# Altium PCB 40-主控板-电路图.PcbDoc
Units mil, origin at the board's own origin, x right, y up, seen from the top; angles counter-clockwise.
Board outline 2637.8 x 3818.9 mil, 2 copper layers (Top Layer, Bottom Layer); 74 components, 83 nets, 419 pads, 185 vias.
Unrouted connection lines stored in the file: 3.
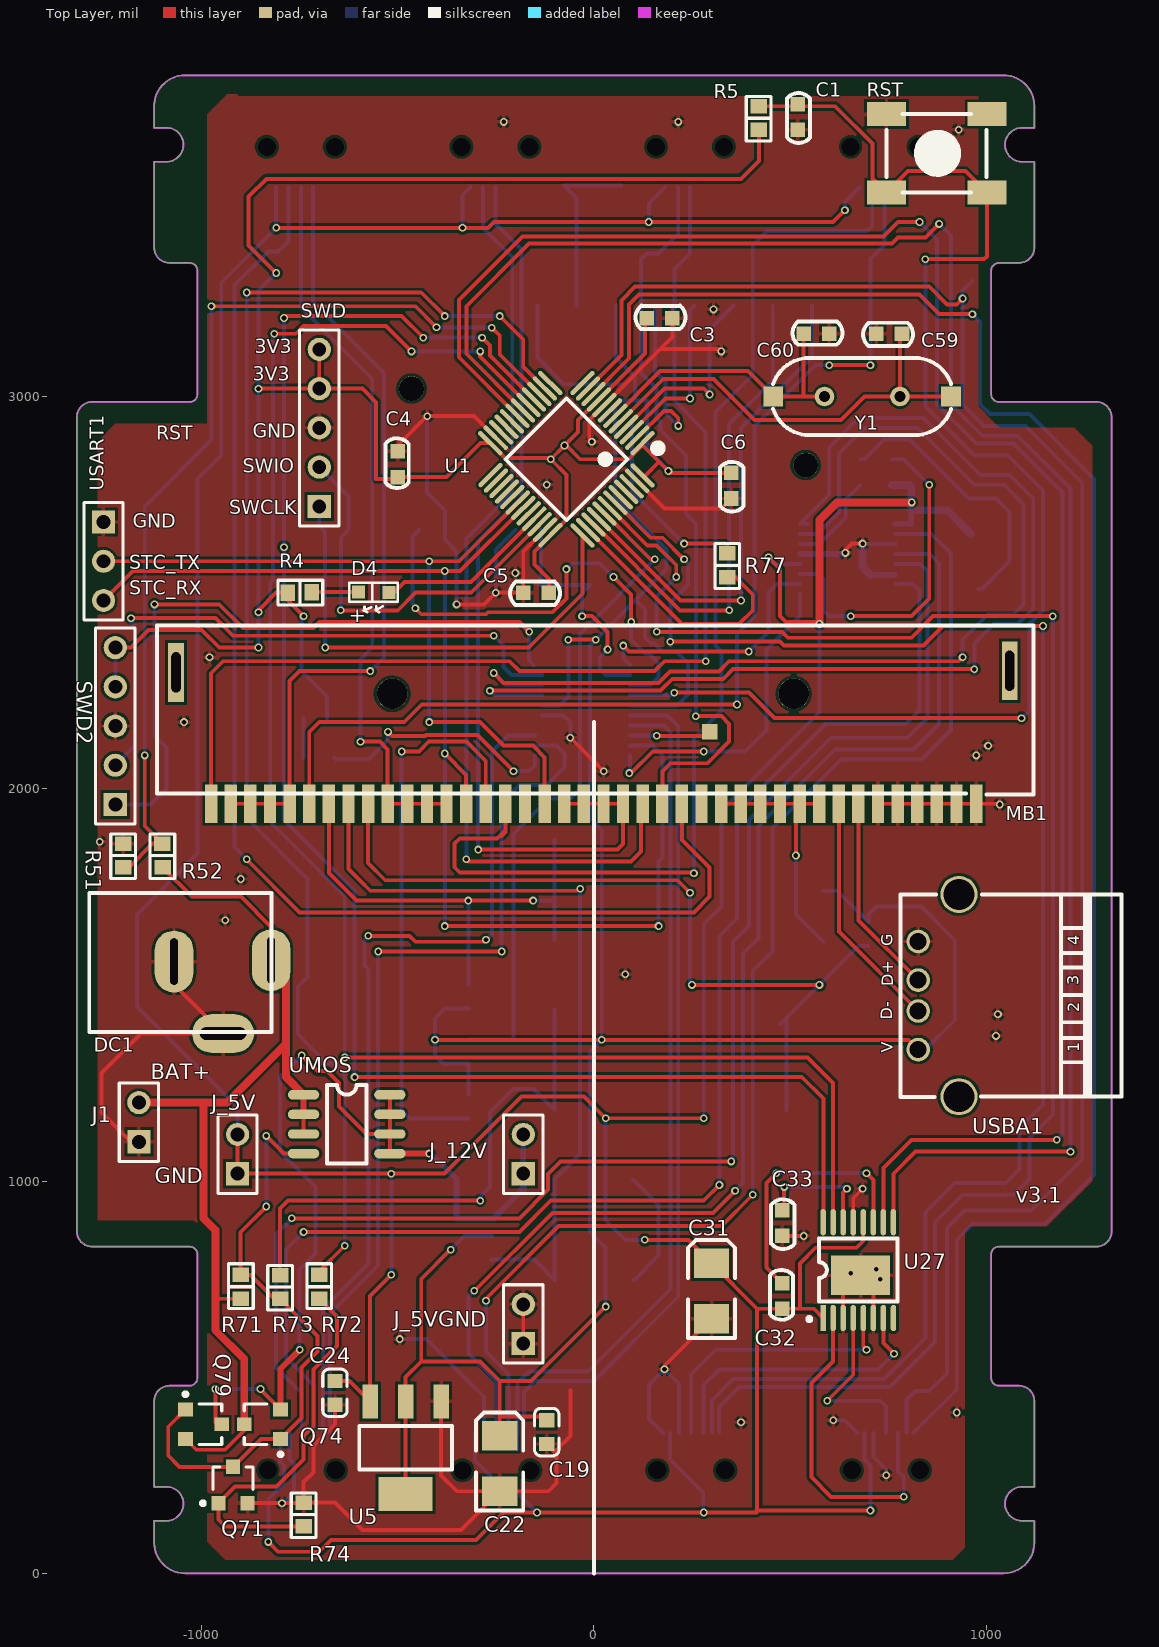
[diagram p0: Top Layer view]
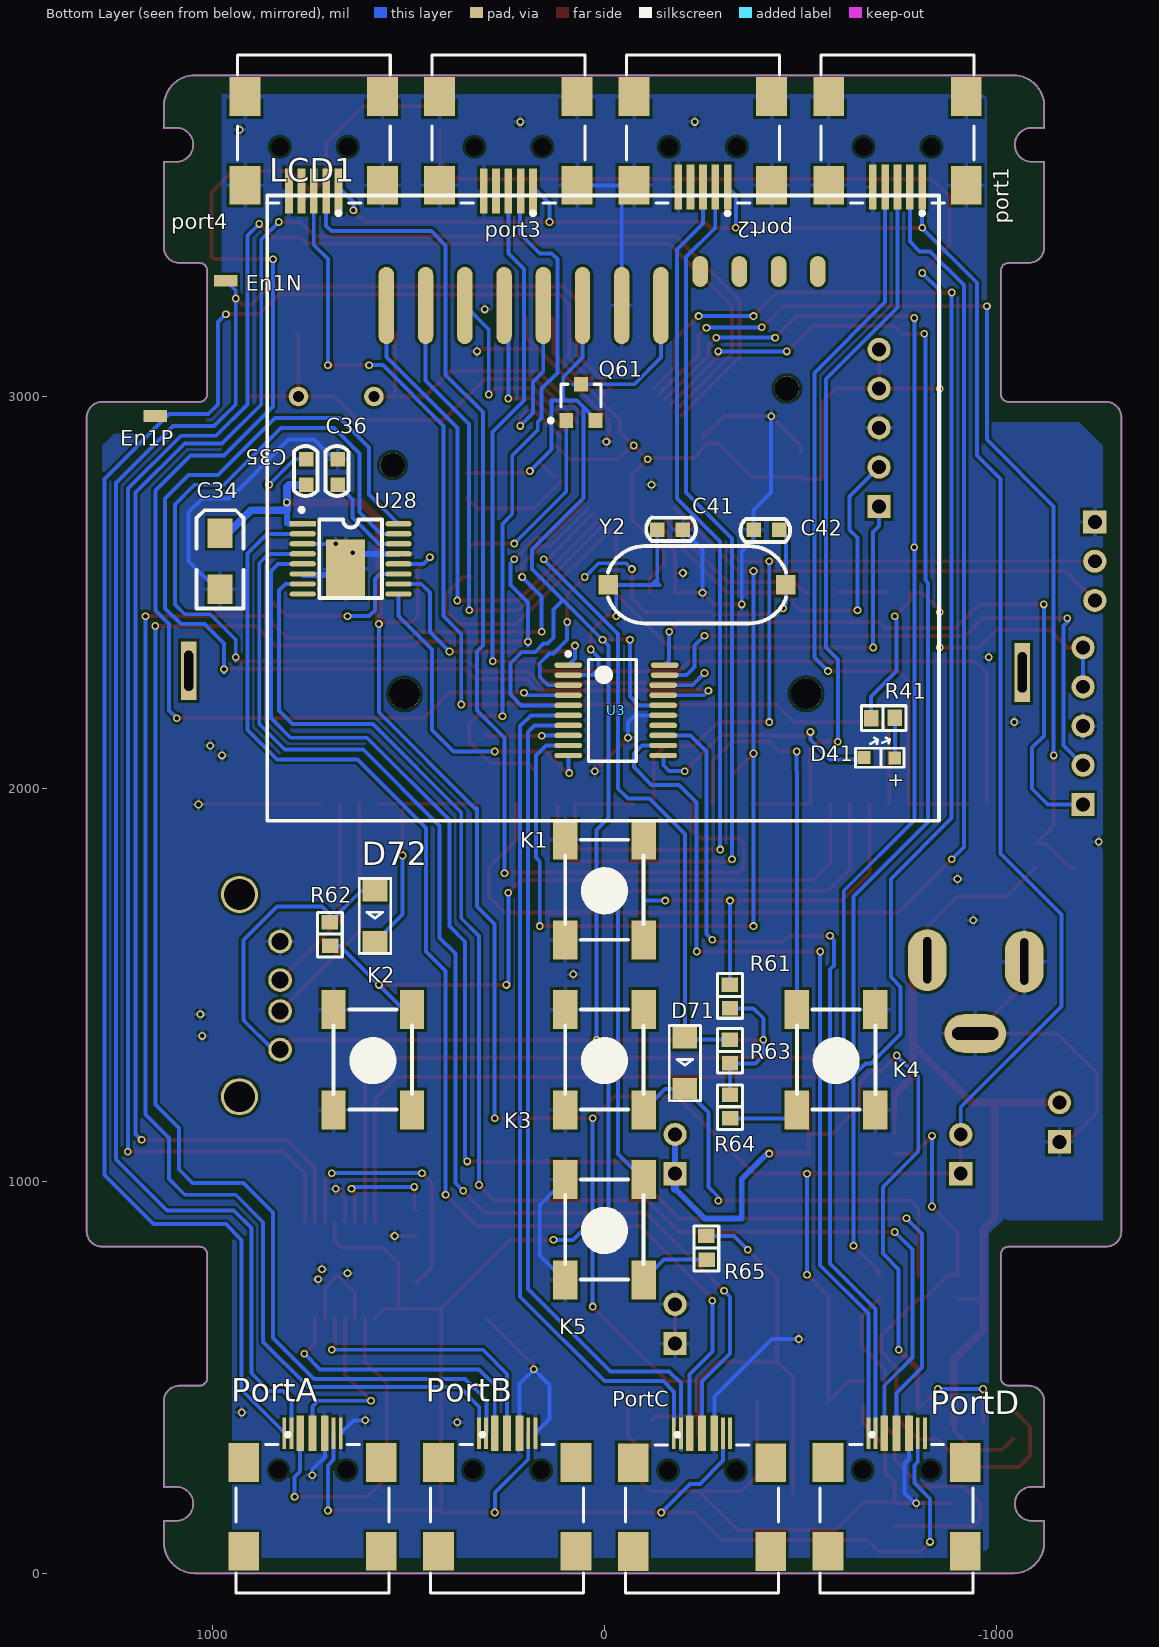
[diagram p1: Bottom Layer view, seen from below]

## Layer stack, top to bottom
Top Layer: signal copper 1.4
Dielectric: dielectric 12.6, FR-4, Dk 4.8
Bottom Layer: signal copper 1.4

## Board outline
-1121.01,220.47 -1089.52,220.47 cw(c-1089.52,177.17) -1089.52,133.86 -1121.01,133.86 -1121.01,78.74 ccw(c-1042.27,78.74) -1042.27,0 1044.34,0 ccw(c1044.34,78.74) 1123.08,78.74 1123.08,133.86 1091.59,133.86 cw(c1091.59,177.17) 1091.59,220.47 1123.08,220.47 1123.08,438.98 ccw(c1083.71,438.98) 1083.71,478.35 1032.53,478.35 cw(c1032.53,498.03) 1012.85,498.03 1012.85,812.99 cw(c1032.53,812.99) 1032.53,832.68 1280.56,832.68 ccw(c1280.56,872.05) 1319.93,872.05 1319.93,2946.85 ccw(c1280.56,2946.85) 1280.56,2986.22 1032.53,2986.22 cw(c1032.53,3005.91) 1012.85,3005.91 1012.85,3320.87 cw(c1032.53,3320.87) 1032.53,3340.55 1083.71,3340.55 ccw(c1083.71,3379.92) 1123.08,3379.92 1123.08,3598.43 1091.59,3598.43 cw(c1091.59,3641.73) 1091.59,3685.04 1123.08,3685.04 1123.08,3740.16 ccw(c1044.34,3740.16) 1044.34,3818.9 -1042.27,3818.9 ccw(c-1042.27,3740.16) -1121.01,3740.16 -1121.01,3685.04 -1089.52,3685.04 cw(c-1089.52,3641.73) -1089.52,3598.43 -1121.01,3598.43 -1121.01,3379.92 ccw(c-1081.64,3379.92) -1081.64,3340.55 -1030.46,3340.55 cw(c-1030.46,3320.87) -1010.78,3320.87 -1010.78,3005.91 cw(c-1030.46,3005.91) -1030.46,2986.22 -1278.49,2986.22 ccw(c-1278.49,2946.85) -1317.86,2946.85 -1317.86,872.05 ccw(c-1278.49,872.05) -1278.49,832.68 -1030.46,832.68 cw(c-1030.46,812.99) -1010.78,812.99 -1010.78,498.03 cw(c-1030.46,498.03) -1030.46,478.35 -1081.64,478.35 ccw(c-1081.64,438.98) -1121.01,438.98

## Design rules (kind name [scope] priority, off if disabled: settings)
Clearance [All] p1: gap=7
PolygonConnect [All] p1: connectstyle=Relief reliefconductorwidth=10 reliefentries=4 polygonreliefangle="90 Angle"
RoomDefinition ytBase30A [InComponentClass('ytBase30A')] p1: confinementstyle=ConfineIn formatcopy=TRUE lockcomponents=FALSE outline 1365,-38.09 2740,-38.09 2740,586.91 1365,586.91
RoutingVias [All] p1: holewidth=28 width=50 viastyle="Through Hole" minholewidth=28 minwidth=50 maxholewidth=28 maxwidth=50
SilkscreenOverComponentPads [All] p1: minsilkscreentomaskgap=10
SolderMaskExpansion [All] p1: expansion=4
TestPointUsage [All] p1: valid=0 allowmultiple=FALSE
Testpoint [All] p1: side=15 testpointundercomponent=TRUE minsize=40 maxsize=100 preferedsize=60 minholesize=0 maxholesize=40 preferedholesize=32 testpointgrid=1 style=1023 order=0123456789
Width [All] p1: maxlimit=10 minlimit=10 preferedwidth=10
23 further rules are at their usual default settings.

## Components (designator, comment, footprint, x,y, rotation, side; value= is the part's Value field where it differs from the comment)
C1 "104" C0603 520,3680 r0 top
C3 "0.1uf" C0603 200,3200 r90 top
C4 "0.1uf" C0603 -500,2860 r180 top
C5 "0.1uf" C0603 -180,2500 r270 top
C6 "0.1uf" C0603 350,2740 r0 top
C19 "0.1uf" LC-0603_C -120,360 r90 top
C22 "22uf" "CD B(3528)"#1 -240,280 r270 top
C24 "0.1uf" LC-0603_C -660,460 r90 top
C31 "10uf" "CD B(3528)"#1 300,720 r270 top
C32 "10nF" C0603 480,740 r180 top
C33 "2.2uF" C0603 480,860 r0 top
C34 "10uf" "CD B(3528)"#2 980,2580 r270 bottom
C35 "10nF" C0603 760,2840 r0 bottom
C36 "2.2uF" C0603 680,2840 r0 bottom
C41 "22P" C0603 -200,2660 r90 bottom
C42 "22P" C0603 -380,2660 r270 bottom
C59 "22P" C0603 720,3160 r270 top
C60 "22P" C0603 600,3160 r90 top
D4 "蓝色" D0603 -600,2500 r0 top
D41 "蓝色" D0603 -740,2080 r0 bottom
D71 "1N4148" SMD-IN4148#1 -180,1420 r270 bottom
D72 "1N4148" SMD-IN4148#2 650,1720 r180 bottom
DC1 "电源插口" DC1 -822.83,1562.99 r270 top locked
J1 "Header 2" HDR1X2 -1160,1100 r90 top
J_5V "Header 2" HDR1X2 -908.35,1018.74 r90 top
J_5VGND "Header 2" HDR1X2 -180,585.67 r90 top
J_12V "Header 2" HDR1X2 -180,1018.74 r90 top
K1 "3x6x5" KEY_4SMD -100,1870.08 r270 bottom locked
K2 "3x6x5" KEY_4SMD 490.55,1437.01 r270 bottom locked
K3 "3x6x5" KEY_4SMD -100,1437.01 r270 bottom locked
K4 "3x6x5" KEY_4SMD -690.55,1437.01 r270 bottom locked
K5 "3x6x5" KEY_4SMD -100,1003.94 r270 bottom locked
LCD1 "LCDJLX" LCDLJX-SHU 600,3240 r180 bottom locked
MB1 "MicroBit" IDE1 974.41,1961.81 r90 top locked
port1 "MicroUSB" USB/SM0.8-6H5#1 -742.01,3673.23 r90 bottom locked
port2 "MicroUSB" USB/SM0.8-6H5#1 -245.94,3673.23 r90 bottom locked
port3 "MicroUSB" USB/SM0.8-6H5#2 250,3673.23 r90 bottom locked (schematic designator MINI3)
port4 "MicroUSB" USB/SM0.8-6H5#2 746.06,3673.23 r90 bottom locked
PortA "MicroUSB" USB6P 806.3,287.4 r270 bottom locked
PortB "MicroUSB" USB6P 310.24,287.4 r270 bottom locked
PortC "MicroUSB" USB6P -186.61,287.09 r270 bottom locked
PortD "MicroUSB" USB6P -682.68,287.4 r270 bottom locked
Q61 "9015" sot-23r 60,2980 r180 bottom
Q71 "9014" sot-23r -920,220 r0 top
Q74 "9015" sot-23r -840,380 r90 top
Q79 "9015" sot-23r -1000,380 r270 top (schematic designator Q74)
R4 "1K" R0603 -780,2500 r0 top
R5 "1K" R0603 420,3740 r270 top
R41 "1K" R0603 -680,2180 r180 bottom
R51 "1k 0.1%" R0603 -1200,1860 r270 top
R52 "10k 0.1%" R0603 -1100,1860 r270 top
R61 "1K" R0603 -320,1440 r90 bottom
R62 "1K" R0603 700,1660 r270 bottom
R63 "1K" R0603 -320,1300 r90 bottom
R64 "1K" R0603 -320,1220 r270 bottom
R65 "1K" R0603 -260,860 r270 bottom
R71 "100K" R0603 -900,700 r90 top
R72 "10k" R0603 -700,700 r90 top
R73 "1.5k" R0603 -800,760 r270 top
R74 "4.7k" R0603 -740,180 r270 top
R77 "4.7k" R0603 340,2600 r270 top
RST "3x6x5" key_4smd 746.06,3720 r0 top
SWD "SWD" HDR1X5 -700,2720 r90 top
SWD2 "SWD2" HDR1X5 -1220,1960 r90 top
U1 "STM32F103C8T6" "LQFP48 7X7_M" -70,2840 r135 top
U3 "STM32F042F6P6" STM-TSSOP20_N -20,2200 r180 bottom (schematic designator U1)
U5 "AMS1117_1" LC-SOT-223 -480,320 r90 top
U27 "DRV8833" TSSOP16_M 660,580 r90 top
U28 "DRV8833" TSSOP16_M 840,2600 r180 bottom
UMOS "Comment" so-8 -740,1220 r0 top
USART1 "Header 3" HDR1X3 -1250,2680 r270 top
USBA1 "USB" USB-A 826.77,1614.17 r90 top locked
Y1 "8M" XTAL_US#1 780,3000 r180 top
Y2 "8M" XTAL_US#2 -140,2520 r180 bottom

## Footprints (in the part's own frame and the unit in brackets; to place one, negate y for a bottom-side part, rotate by r counter-clockwise, add the part's x,y. Pads: shape width x height; smd on the part's side, far side on the other; paste and mask are expansions set on the pad)
C0603 [mil]
  rect 37x37 smd: 1(0,0) 2(0,65.5)
  silkscreen extent -28,-34 32,94
"CD B(3528)"#1 [mil] "长3.5mm，宽2.8mm，厚1.9mm"
  rect 75x90 smd: 1(-70.87,-0.01) 2(70.86,-0.01)
  silkscreen extent -130,-60 120,60, body extent -69,-55 69,55, height 75
"CD B(3528)"#2 [mil] "长3.5mm，宽2.8mm，厚1.9mm"
  rect 75x62.99 smd: 1(-70.87,-0.01) 2(70.86,-0.01)
  silkscreen extent -130,-60 120,60, body extent -69,-55 69,55, height 75
D0603 [mil]
  rect 33x33 smd: 1(0,1.5) 2(78,0)
  silkscreen extent -24,-50 100,25
DC1 [mm]
  oval 4x2.5 hole 0.5 slot 3 at 0 deg: 1(0,0) 3(0.089,-6.286)
  oval 2.5x4 hole 0.8 slot 3 at 90 deg: 2(4.75,-3.111)
  silkscreen extent -4.36,-11.77 4.66,0.04
HDR1X2 [mm] "Connector; Header; 2 Position"
  rect 1.5x1.5 hole 0.9: 1(0,0)
  round 1.5 hole 0.9: 2(2.54,0)
  silkscreen extent -1.27,-1.27 3.81,1.27
HDR1X3 [mm] "Connector; Header; 3 Position"
  rect 1.5x1.5 hole 0.9: 1(0,0)
  round 1.5 hole 0.9: 2(2.54,0) 3(5.08,0)
  silkscreen extent -1.27,-1.27 6.35,1.27
HDR1X5 [mm] "Connector; Header; 5 Position"
  rect 1.5x1.5 hole 0.9: 1(0,0)
  round 1.5 hole 0.9: 2(2.54,0) 3(5.08,0) 4(7.62,0) 5(10.16,0)
  silkscreen extent -1.27,-1.27 11.43,1.27
IDE1 [mm]
  rect 2.5x0.8 smd: 1(0,49.53) 2(0,48.26) 3(0,46.99) 4(0,45.72) 5(0,44.45) 6(0,43.18) 7(0,41.91) 8(0,40.64) 9(0,39.37) 10(0,38.1) 11(0,36.83) 12(0,35.56) 13(0,34.29) 14(0,33.02) 15(0,31.75) 16(0,30.48) 17(0,29.21) 18(0,27.94) 19(0,26.67) 20(0,25.4) 21(0,24.13) 22(0,22.86) 23(0,21.59) 24(0,20.32) 25(0,19.05) 26(0,17.78) 27(0,16.51) 28(0,15.24) 29(0,13.97) 30(0,12.7) 31(0,11.43) 32(0,10.16) 33(0,8.89) 34(0,7.62) 35(0,6.35) 36(0,5.08) 37(0,3.81) 38(0,2.54) 39(0,1.27) 40(0,0)
  rect 3.81x1.016 hole 0.6 slot 2.6 at 0 deg: 41(8.611,-2.172) 42(8.509,51.803)
  round 2 hole 2: 43(7.12,37.808) 44(7.12,11.811)
  silkscreen extent 0.6,-3.71 11.53,53.04
KEY_4SMD [mil]
  rect 100x62 smd: 1(0,0) 1(255.91,0) 2(0,-200) 2(255.91,-200)
  silkscreen extent 0,-200 255,0
key_4smd [mil]
  rect 100x62 smd: 1(0,0) 1(255.91,0) 2(0,-200) 2(255.91,-200)
  silkscreen extent 0,-200 255,0
LC-0603_C [mm]
  rect 0.93x0.98 smd: 1(-0.77,0) 2(0.77,0)
  silkscreen extent -1.54,-0.79 1.54,0.79, body extent -0.8,-0.4 0.8,0.4, height 0.3
LC-SOT-223 [mm]
  rect 2.2x1 smd: 1(3,-2.3) 2(3,0) 3(3,2.3)
  rect 2.2x3.5 smd: 2(-3,0)
  silkscreen extent -1.4,-3 1.4,3, body extent -3.49,-3.24 3.49,3.24, height 1.64
LCDLJX-SHU [mm]
  oval 1x2 smd: 1(29.058,2) 2(26.518,2) 3(23.978,2) 4(21.438,2)
  oval 1x5 smd: 5(18.898,-0.2) 6(16.358,-0.2) 7(13.818,-0.2) 8(11.278,-0.2) 9(8.738,-0.2) 10(6.198,-0.2) 11(3.658,-0.2) 12(1.118,-0.2)
  silkscreen extent -6.59,-33.57 36.91,6.93
"LQFP48 7X7_M" [mm] "48脚，体宽7x7mm，脚距0.5mm"
  oval 0.3x2.1 smd: 1(-2.75,-4.227) 2(-2.25,-4.227) 3(-1.75,-4.227) 4(-1.25,-4.227) 5(-0.75,-4.227) 6(-0.25,-4.227) 7(0.25,-4.227) 8(0.75,-4.227) 9(1.25,-4.227) 10(1.75,-4.227) 11(2.25,-4.227) 12(2.75,-4.227) 25(2.75,4.202) 26(2.25,4.202) 27(1.75,4.202) 28(1.25,4.202) 29(0.75,4.202) 30(0.25,4.202) 31(-0.25,4.202) 32(-0.75,4.202) 33(-1.25,4.202) 34(-1.75,4.202) 35(-2.25,4.202) 36(-2.75,4.202)
  oval 2.1x0.3 smd: 13(4.227,-2.75) 14(4.227,-2.25) 15(4.227,-1.75) 16(4.227,-1.25) 17(4.227,-0.75) 18(4.227,-0.25) 19(4.227,0.25) 20(4.227,0.75) 21(4.227,1.25) 22(4.227,1.75) 23(4.227,2.25) 24(4.227,2.75) 37(-4.227,2.75) 38(-4.227,2.25) 39(-4.227,1.75) 40(-4.227,1.25) 41(-4.227,0.75) 42(-4.227,0.25) 43(-4.227,-0.25) 44(-4.227,-0.75) 45(-4.227,-1.25) 46(-4.227,-1.75) 47(-4.227,-2.25) 48(-4.227,-2.75)
  silkscreen extent -3.93,-4.95 2.79,2.79, body extent -4.5,-4.5 4.5,4.5, height 1.45
R0603 [mil]
  rect 37x42 smd: 1(0,0) 2(60.5,0.5)
  silkscreen extent -25,-32 89,31
SMD-IN4148#1 [mm]
  rect 1.4x1.6 smd: 1(1.397,0.635) 2(4.699,0.635)
  silkscreen extent 0.6,-0.38 5.46,1.65
SMD-IN4148#2 [mm]
  rect 1.6x1.4 smd: 1(1.651,0.508) 2(1.651,-2.794)
  silkscreen extent 0.63,-3.56 2.67,1.31
so-8 [mil]
  oval 80x24 smd: 1(0,0) 2(0,-50) 3(0,-100) 4(0,-150) 5(220,-150) 6(220,-100) 7(220,-50) 8(220,0)
  silkscreen extent 60,-175 160,25
sot-23r [mm]
  rect 0.9x0.95 smd: 1(-0.95,-1.048) 2(0.95,-1.048) 3(0,1.302)
  silkscreen extent -2.07,-1.17 1.3,1.3
STM-TSSOP20_N [mm] "SOP, 20-Leads, Body 6.6x4.5mm, Pitch 0.65mm, IPC Medium Density"
  oval 1.8x0.35 smd: 1(-2.85,2.925) 2(-2.85,2.275) 3(-2.85,1.625) 4(-2.85,0.975) 5(-2.85,0.325) 6(-2.85,-0.325) 7(-2.85,-0.975) 8(-2.85,-1.625) 9(-2.85,-2.275) 10(-2.85,-2.925) 11(3.292,-2.925) 12(3.292,-2.275) 13(3.292,-1.625) 14(3.292,-0.975) 15(3.292,-0.325) 16(3.292,0.325) 17(3.292,0.975) 18(3.292,1.625) 19(3.392,2.275) 20(3.392,2.925)
  silkscreen extent -2.98,-3.3 1.55,3.77, body extent -2.25,-3.3 2.25,3.3, height 1.2
TSSOP16_M [mm]
  rect 1.7x0.35 smd: 1(1.802,1.919)
  oval 1.7x0.35 smd: 2(1.802,1.269) 3(1.802,0.619) 4(1.802,-0.031) 5(1.802,-0.681) 6(1.802,-1.331) 7(1.802,-1.981) 8(1.802,-2.631) 9(8.002,-2.631) 10(8.002,-1.981) 11(8.002,-1.331) 12(8.002,-0.681) 13(8.002,-0.031) 14(8.002,0.619) 15(8.002,1.269) 16(8.002,1.919)
  silkscreen extent 1.6,-2.9 6.93,2.95, body extent 1.7,-2.86 8.1,2.14, height 1.03
USB6P [mm]
  rect 2.032x0.254 smd: 1(-1.778,-0.254) 2(-1.778,0.203) 5(-1.778,3.402) 6(-1.778,2.946)
  rect 2.3x0.5 smd: 3(-1.778,0.775) 4(-1.778,1.575) 5(-1.778,2.375)
  rect 2.5x2 smd: 7(0.122,-2.875) 7(0.122,6.025) 7(5.876,-2.875) 7(5.876,6.025)
  round 0.9 hole 1.17 unplated: MH1(0.622,3.774) MH2(0.622,-0.625)
  silkscreen extent -1.8,-3.38 8.57,6.52
USB-A [mm]
  round 1.524 hole 1.1: 1(-7.089,-0.002) 2(-4.589,-0.002) 3(-2.589,-0.002) 4(-0.089,-0.002)
  round 2.4 hole 2: 5(-10.139,-2.637) 5(2.961,-2.637)
  silkscreen extent -10.17,-13.16 2.96,1.14, body extent -11.29,-12.98 4.51,1.18, height 2.2
USB/SM0.8-6H5#1 [mm]
  rect 2.9x0.5 smd: 1(-3.532,-1.727) 2(-3.532,-0.927) 3(-3.532,-0.127) 4(-3.532,0.673) 5(-3.532,1.473)
  rect 2.5x2 smd: 6(-3.432,-4.577) 6(-3.432,4.323) 7(2.322,-4.577) 7(2.322,4.323)
  round 0.6 hole 1.17 unplated: MH1(-0.932,2.073) MH2(-0.932,-2.327)
  silkscreen extent -5.36,-5.08 5.02,4.82
USB/SM0.8-6H5#2 [mm]
  rect 2.9x0.5 smd: 1(-3.8,-1.727) 2(-3.8,-0.927) 3(-3.8,-0.127) 4(-3.8,0.673) 5(-3.8,1.473)
  rect 2.5x2 smd: 6(-3.432,-4.577) 6(-3.432,4.323) 7(2.322,-4.577) 7(2.322,4.323)
  round 0.6 hole 1.17 unplated: MH1(-0.932,2.073) MH2(-0.932,-2.327)
  silkscreen extent -5.36,-5.08 5.02,4.82
XTAL_US#1 [mil]
  rect 50x50 smd: 1(-130.32,0) 2(322.44,0)
  round 50 hole 28: 1(0,0) 2(192.12,0)
  silkscreen extent -131,-98 323,98
XTAL_US#2 [mil]
  round 0 all layers, no hole: 1(0,0) 2(192.13,0)
  rect 50x50 smd: ""(-130.32,0) ""(322.44,0)
  silkscreen extent -131,-98 323,98

## Part data
C1 C32 C33 C35 C36 C41 C42 C59 C60: library part C, "无极性贴片电容"
C3 C4 C5 C6: library part Cap, "Capacitor"
C19 C24: library part cap
C22 C31 C34: library part "Cap Pol2", "Polarized Capacitor (Axial)"
D4 D41: library part LED-SMD, "贴片LED"
D71 D72: library part "Diode 1N4148", "High Conductance Fast Diode"
DC1: library part power_port
J1 J_5V J_5VGND J_12V: "Header, 2-Pin"
port1 port2 port3 port4 PortA PortB PortD: library part 440478-2, "USB 2.0, Right Angle, SMT, A Type, Receptacle, 5 Position, Black"
Q61 Q74 Q79: library part PNP9015
Q71: library part NPN, "NPN Bipolar Transistor"
R4 R5 R41 R61 R62 R63 R64 R65 R71: library part R, "贴片电阻"
R51 R52 R72 R73 R74 R77: library part R
RST: library part "TSW 3x6", "3x6轻触开关"
SWD SWD2: library part "Header 5", "5P接插件"
U1: "STM32 ARM-based 32-bit MCU with 64 Kbytes Flash, 48-pin LQFP, Industrial Temperature"
U3: library part STM32F030F4P6, "ARM Cortex-M0 32-bit MCU, 16 KB Flash, 4 KB Internal RAM, 15 I/Os, 20-pin TSSOP, -40 to 85 degC, Tube"
U5: "3.3V电压转换器AMS1117"
U27 U28: library part DRV8833_NEW, "双H-桥电机驱动"
USART1: "Header, 3-Pin"
Y1 Y2: library part XTAL, "Crystal Oscillator"

## Free pads (board coordinates)
  round 62.99 hole 62.99: 0(-465,3020) 0(540,2825)
  rect 39.37x39.37 smd: 0(295,2145)
  rect 100x150 smd far side: 0(660,2560)
  rect 150x100 smd: 0(680,760)
  rect 60x30 smd far side: 0(965,3295) 0(1145,2950)

## Via types
v1: diameter 19.68, hole 11.81, Top Layer to Bottom Layer, 185 vias

## Nets (pads, with @x,y where several pads share a name; then routed paths per layer and width w, separated by ;. In a path a pad name is that pad's centre, name@x,y a point inside that pad or via, vN(x,y) a via of type N, cw(c..) or ccw(c..) an arc to the next point about the centre after c; other vN are vias at no path point)
3V3: C3.2 C4.2 C5.2 C6.2 C19.2 C22.1 D72.1 LCD1.7 Q61.2 R4.1 R5.2 R41.1 R61.1 R62.1 R63.1 R64.1 R65.1 SWD2.4 SWD2.5 SWD.4 SWD.5 U1.1 U1.9 U1.24 U1.36 U1.48 U3.5 U3.16 U5.2 USBA1.1 | length 13986.6
  Top Layer w10: SWD2.5 -1180,2360 -1135,2405 -1000,2405 -955,2360 v1(-855,2360) ; v1(-855,2450) -855,2455 -810,2500 R4.1 -780,2480 v1(-740,2440) ; v1(-855,3020) -795,3020 SWD.4 ; v1(-810,3315) -880,3385 -880,3510 -835,3555 375,3555 420.5,3600.5 R5.2 ; SWD.5 SWD.4 ; U5.2@-480,201.89 -480,438.11 -480,500 -440,540 ; v1(-405,1360) v1(20,1360) 801.77,1360 826.69,1335.08 USBA1.1 USBA1.1@826.77,1335 ; v1(-365,825) -440,750 -440,540 ; C22.1 -240.01,400 ; C19.2 -129.69,400 -240.01,400 ; C5.2 -114.5,2534.5 -151.89,2571.89 -151.89,2605 U1.36 -70,2686.89 -70,2800 v1(-110,2840) ; v1(-65,2380) v1(5,2380) v1@8.4,2383.4 ; v1(30,680) -159.99,490.01 -240.01,490.01 ; 40,2840 55,2840 ; U1.48 131.47,2798.88 166.29,2833.71 ; C3.2 130,3195.5 130,3109.6 U1.9 -40,2939.6 -40,2910 v1(-75,2875) ; C6.2@350,2805 195,2805 v1(190,2810) 166.29,2833.71 ; SWD.4 -590,3020 -555,2985 -555,2790 -504.5,2790 C4.2 -375.5,2794.5 -288.88,2881.12 U1.24 -226.56,2843.44 -113.44,2843.44 v1(-110,2840) ; -440,540 -290,540 -240.01,490.01 ; -240.01,400 -240.01,490.01 ; v1(-110,2840) v1(-75,2875) ; v1(-75,2875) -70,2875 -35,2840 55,2840 ; 55,2840 88.46,2840 124.23,2875.77 166.29,2833.71
  Bottom Layer w10: SWD2.4 SWD2.5 ; v1(-855,2360) v1(-855,2450) v1(-855,3020) -855,3270 v1(-810,3315) ; -745,2390 -745,2355 ; v1(-740,2440) -745,2435 -745,2355 ; R41.1 -680,2235 -745,2300 -745,2355 ; v1(-365,825) -330,860 R65.1 ; R64.1 R63.1 -385,1300 -405,1320 v1(-405,1360) -405,1415 -380,1440 R61.1 ; U3.16@-132.2,2212.8 -87.2,2212.8 -65,2235 v1(-65,2380) ; Q61.2 22.6,2942.6 53.43,2973.43 ; v1(30,680) 30,830 -10,870 -10,1330 v1(20,1360) 20,1895 -10,1925 -10,2365 v1(5,2380) 105.87,2480.87 ; LCD1.7 56,3099 105,3050 105,2990 ; U3.5 212.8,2212.8 240,2240 240,2320 212,2348 177,2348 155,2370 145,2370 130,2385 130,2456.74 105.87,2480.87 ; v1(190,2810) 135,2865 135,2990 105,2990 ; D72.1 620,1740 R62.1 700,1680 720,1700 835,1700 920,1615 920,1410 845.08,1335.08 USBA1.1 ; 53.43,2973.43 70,2990 105,2990 ; 53.43,2973.43 53.43,2741.57 185,2610 185,2560 105.87,2480.87
5V: C24.2 C31.1 C32.2 C34.1 C35.2 J_5V.1 J_5V.2 port1.1 port2.1 port3.1 port4.1 PortA.6 PortB.6 PortC.6 PortD.6 U5.3 U27.1 U27.12 U28.1 U28.12 | length 13613.5
  Top Layer w10: J_5V.2 J_5V.1 v1(-516.26,1018.74) ; v1(-830,80) -805,55 -700,55 -670,85 -300,85 -230,155 v1(-145,155) v1(280,155) 415,155 ; v1(-810,3430) v1(-335,3430) -270,3430 -255,3445 v1(140,3445) 610,3445 v1(640,3475) ; C24.2 -622.76,490.31 U5.3 ; U5.3@-582.76,450.31 U5.3 ; v1(-516.26,761.26) -570.55,706.97 U5.3 ; v1@-515,1020 v1(-516.26,1018.74) ; v1(130,850) 240.87,850 C31.1 416.37,674.5 ; v1(280,1160) v1(30,1160) -25,1215 -185,1215 -381.26,1018.74 v1(-516.26,1018.74) ; v1(445,2590) 475,2560 475,2440 490,2425 570,2425 v1(575,2420) ; U27.1 560.89,674.5 525,674.5 ; U27.12 686.8,846.8 670,830 565,830 525,790 525,674.5 ; v1(705,160) 415,160 416.37,161.37 416.37,674.5 ; 416.37,674.5 C32.2 525,674.5
  Top Layer w20: v1(575,2420) 575,2685 620,2730 v1(810,2730)
  Bottom Layer w10: -1165,1610 -1165,1570 ; J_5V.2 -908.35,1188.35 -1165,1445 -1165,1570 ; v1(-830,80) -830,190 -790,230 -790,275 -798.66,283.66 PortD.6 ; port1.1 v1(-810,3430) -950,3290 -950,2850 -1010,2790 -1010,1835 -1165,1680 -1165,1570 ; v1(-516.26,1018.74) v1(-516.26,761.26) v1@-515,760 ; v1(-335,3430) -335,3513.11 port2.1 ; PortC.6 -302.6,287.6 -243.11,228.11 -218.11,228.11 v1(-145,155) ; v1(30,1160) 30,900 80,850 v1(130,850) ; v1(140,3445) 140,3492.17 port3.1@182.01,3534.17 ; PortB.6 194.25,290.75 278.74,206.26 278.74,156.26 v1(280,155) ; v1(280,1160) 280,1655 325,1700 325,1950 330,1950 575,2195 v1(575,2420) ; v1(445,2590) 461.8,2573.2 U28.12 U28.12@526.75,2575 ; v1(640,3475) 640,3496.1 port4.1@678.07,3534.17 ; PortA.6 690.31,289.69 705,275 v1(705,160) ; 804.55,2774.5 809.05,2770
  Bottom Layer w15: U28.1 809.05,2675.57 809.05,2710
  Bottom Layer w20: C35.2 804.55,2774.5 ; 809.05,2770 809.05,2710 900.88,2710 C34.1@960.01,2650.87
12V: DC1.1 J1.2 Q74.3 Q79.2 R52.2 R71.1 UMOS.1 UMOS.2 UMOS.3 | length 2514.6
  Top Layer w10: R52.2 -1025,1725 -900,1725 -822.83,1647.83 DC1.1 DC1.1@-785,1525.16 ; Q79.2 -1013.66,315 -940,315 -891.26,363.74 Q74.3 ; -965,685 -965,700 R71.1 ; UMOS.3 UMOS.2
  Top Layer w15: UMOS.2 UMOS.1
  Top Layer w20: J1.2@-1180,1200 J1.2 -1045,1200 ; -1060,1200 -1045,1200 ; Q74.3 -891.26,546.26 -965,620 -965,700 -965,875 -995,905 -995,1200 ; DC1.1@-785,1525.16 -785,1350 ; UMOS.1 -785,1265 -785,1350 ; -1045,1200 -995,1200 ; -995,1200 -935,1200 -785,1350
ADC1: R51.2 R52.1 U1.15 | length 2595.1
  Top Layer w10: R51.2 -1185.5,1799.5 -1125,1860 R52.1 -1145,1905 -1145,2050 ; -1145,2025 -1145,2050 ; v1(-1145,2085) -1145,2050 ; v1(-975,3230) -455,3230 v1(-401.23,3176.23) ; v1(-260,3175) -240,3155 -240,3107.44 U1.15
  Bottom Layer w10: v1@-1145,2080 v1(-1145,2085) -1145,2720 -975,2890 -975,3135 ; -975,3160 -975,3135 ; v1(-975,3230) -975,3135 ; v1(-401.23,3176.23) -261.23,3176.23 v1(-260,3175)
AIN1: U1.16 U27.16 | length 4308.2
  Top Layer w10: v1(-790,3200) -785,3205 -490,3205 v1(-435,3150) ; v1(-610,1265) 530,1265 585,1210 585,895.61 U27.16 ; v1@-432.5,3152.5 v1@-430,3150 ; v1(-285,3150) -265,3130 -265,3104.6 U1.16
  Bottom Layer w10: -790,3190 -790,3170 ; v1(-790,3200) -790,3170 ; v1(-610,1265) -610,1740 -790,1920 v1(-790,2615.88) -790,3170 ; v1(-435,3150) v1(-285,3150)
AIN2: U1.17 U27.15 | length 4312.4
  Top Layer w10: v1(-815,3160) -760,3160 -740,3180 -530,3180 v1(-465,3115) v1@-465,3120 ; v1(-635,1315) -525,1315 545,1315 610.02,1249.98 U27.15 ; v1(-290,3115) -290,3101.76 U1.17
  Bottom Layer w10: v1@-815,3165 -818.16,3161.84 -818.16,2531.84 -825,2525 -825,1915 -635,1725 v1(-635,1315) ; v1(-465,3115) v1(-290,3115)
AO1: PortA.3 U27.2 | length 938.7
  Top Layer w10: 610.02,610.95 610.02,580 ; U27.2 610.02,580 ; 690,195 640,195 ; v1@795,195 v1(790,195) 640,195 ; 610.02,580 610.02,540.02 555,485 555,245 605,195 640,195
  Bottom Layer w10: PortA.3 775.81,259.19 790,245 v1(790,195)
AO2: PortA.4 U27.4 | length 461.9
  Top Layer w10: v1(595,440) 661.2,506.2 U27.4
  Bottom Layer w10: v1(595,440) 730,440 744.31,425.69 PortA.4
BIN1: U1.18 U27.9 | length 4771.9
  Top Layer w10: U1.18 -325,3108.92 -325,3230 -165,3390 760,3390 775,3405 845,3405 v1(880,3440) ; U27.9 763.57,1018.57 820,1075 v1(1215,1075)
  Bottom Layer w10: v1(880,3440) 910,3410 910,3280 910,2980 990,2900 1080,2900 1215,2765 v1(1215,1075)
BIN2: U1.19 U27.10 | length 4776.4
  Top Layer w10: U1.19 -343.92,3100 -343.92,3246.08 -181.84,3408.16 738.16,3408.16 775,3445 v1(830,3445) ; U27.10 737.98,1032.98 810,1105 v1(1180,1105)
  Bottom Layer w10: v1(830,3445) 875,3400 875,2980 975,2880 1070,2880 1195,2755 1195,1120 v1(1180,1105)
BO1: PortB.3 U27.7 | length 743
  Top Layer w10: U27.7 737.98,587.02 v1(765,560)
  Bottom Layer w10: PortB.3 279.74,479.74 320,520 725,520 v1(765,560)
BO2: PortB.4 U27.5 | length 707.5
  Top Layer w10: U27.5 686.8,578.2 v1(695,570)
  Bottom Layer w10: PortB.4 248.25,508.25 310,570 v1(695,570)
BOOT0: U1.44
CIN1: U3.17 U28.16 | length 2819.8
  Top Layer w10: v1(-265,2250) 170,2250 199.73,2279.73 329.73,2279.73 355,2305 v1(970,2305)
  Bottom Layer w10: v1(-265,2250) -253.39,2238.39 U3.17@-132.2,2238.39 ; U28.16@545.57,2675.57 U28.16 600,2750.61 600,2870 675,2945 840,2945 985,2800 1060,2800 1120,2740 1120,2460 1080,2420 1020,2420 970,2370 v1(970,2305) 970,2295
CIN2: U3.18 U28.15 | length 2720.8
  Top Layer w10: v1(-255,2295) -230,2270 165,2270 194.14,2299.14 319.14,2299.14 345,2325 930,2325 v1(940,2335)
  Bottom Layer w10: v1(-255,2295) -223.98,2263.98 U3.18@-132.2,2263.98 ; U28.15 569.98,2649.98 625,2705 625,2855 690,2920 825,2920 970,2775 1045,2775 1095,2725 1095,2470 1070,2445 1005,2445 940,2380 v1(940,2335) 940,2325
CO1: PortC.3 U28.2 | length 3282.6
  Top Layer w10: v1(-275,695) -275,700 -90,885 325,885 v1(405,965)
  Bottom Layer w10: v1(-275,695) -275,565 -217.11,507.11 PortC.3 ; v1(405,965) 405,1535 455,1585 455,1900 630,2075 835,2075 910,2150 910,2600 860.02,2649.98 834.98,2649.98 U28.2
CO2: PortC.4 U28.4 | length 3222.7
  Top Layer w10: v1(-305,720) -106.01,918.99 303.99,918.99 v1(360,975)
  Bottom Layer w10: v1(-305,720) -320,705 -320,560 -248.6,488.6 PortC.4 ; v1(360,975) 380,995 380,1580 420,1620 420,1905 615,2100 815,2100 880,2165 880,2575 856.2,2598.8 U28.4
DIN1: U3.10 U28.9 | length 825
  Top Layer w10: v1(90,2040) 95,2040 150,2095 v1(280,2095)
  Bottom Layer w10: v1(90,2040) 92.2,2042.2 U3.10 ; v1(280,2095) 385,2095 440,2150 440,2355 524.95,2439.95 U28.9 U28.9@523.52,2495
DIN2: U3.1 U28.10 | length 643
  Top Layer w10: v1(75,2365) 90,2350 v1(395,2350)
  Bottom Layer w10: v1(75,2365) 75,2332.36 U3.1 ; v1(395,2350) 445,2400 445,2500 467.02,2522.02 U28.10
DO1: PortD.3 U28.7 | length 3650
  Top Layer w10: v1(-740,870) -190,870 -110,950 280,950 v1(320,990)
  Bottom Layer w10: v1(-740,870) -785,825 -785,550 -713.17,478.17 PortD.3 ; v1(320,990) 320,1095 ; 320,1030 320,1095 ; U28.7 812.98,2522.02 830,2505 830,2200 795,2165 590,2165 365,1940 365,1670 320,1625 320,1095
DO2: PortD.4 U28.5 | length 3709.5
  Top Layer w10: v1(-770,905) -190,905 -116.6,978.4 -116.6,1018.4 -85,1050 v1(350,1050)
  Bottom Layer w10: v1(-770,905) -810,865 -810,525 -744.67,459.67 PortD.4 ; v1(350,1050) 355,1055 355,1610 395,1650 395,1920 605,2130 800,2130 850,2180 850,2555 831.8,2573.2 U28.5
ENCODE1N: pad.0@965,3295 PortA.2 U1.11 | length 4609.7
  Top Layer w10: U1.11 70,3105.27 70,3245 105,3280 855,3280 900,3235 925,3235 v1(940,3250)
  Bottom Layer w10: PortA.2@797.3,358.27 797.3,442.3 820,465 855,465 900,510 900,880 945,925 1115,925 1245,1055 1245,2780 1100,2925 995,2925 940,2980 v1(940,3250) 940,3270 pad.0@965,3295
ENCODE1P: pad.0@1145,2950 PortA.1 U1.10 | length 4509.9
  Top Layer w10: U1.10 90,3097.44 90,3235 115,3260 830,3260 880,3210 v1(965,3210)
  Bottom Layer w10: PortA.1@815.3,358.27 925,467.97 925,850 965,890 1150,890 1275,1015 1275,2790 1110,2955 1010,2955 985,2980 985,3190 v1(965,3210)
ENCODE2N: PortB.2 U1.43 | length 4185.7
  Top Layer w10: U1.43 143.92,2640 175,2640 v1(230,2585) ; v1(195,2375) 475,2375 485,2365 840,2365 890,2415 v1(1145,2415)
  Bottom Layer w10: 195,2365 v1(195,2375) 195,2475 240,2520 240,2575 v1(230,2585) ; PortB.2@301.24,358.27 301.24,441.24 355,495 740,495 845,600 845,920 920,995 1050,995 1085,1030 1085,1135 1145,1195 1145,2120 ; 1145,2145 1145,2120 ; v1(1145,2415) 1145,2120
ENCODE2P: PortB.1 U1.42 | length 4250
  Top Layer w10: U1.42 136.08,2620 160,2620 210,2570 v1(210,2540) ; v1(160,2400) 480,2400 495,2385 810,2385 865,2440 v1(1170,2440)
  Bottom Layer w10: v1(160,2400) 160,2460 ; 160,2450 160,2460 ; v1(210,2540) 160,2490 160,2460 ; PortB.1@319.24,358.27 319.24,424.24 370,475 755,475 870,590 870,895 940,965 1070,965 1110,1005 1110,1110 1170,1170 1170,2165 ; 1170,2210 1170,2165 ; v1(1170,2440) 1170,2165
ENCODE3N: PortC.2 U3.7 | length 2208.6
  Bottom Layer w10: -195.61,315.61 PortC.2@-195.61,377.09 ; PortC.2 -195,357.47 -195,485 -165,515 -15,515 195,725 195,2145 178.39,2161.61 U3.7
ENCODE3P: PortC.1 U3.6 | length 2167.5
  Bottom Layer w10: PortC.1@-177.61,377.09 -177.61,462.39 -150,490 0,490 215,705 215,2160 187.8,2187.2 U3.6
ENCODE4N: PortD.2 U3.13 | length 2245.7
  Top Layer w10: v1(-575,1625) -470,1625 -455,1610 -280,1610 v1(-275,1615)
  Bottom Layer w10: PortD.2 -690.68,674.32 -575,790 -575,1540 -585,1550 -585,1615 v1(-575,1625) ; v1(-275,1615) -260,1630 -260,2095 -218.98,2136.02 U3.13
ENCODE4P: PortD.1 U3.12 | length 2333.8
  Top Layer w10: v1(-550,1585) -300,1585 ; -255,1585 -300,1585 ; v1(-235,1585) -300,1585
  Bottom Layer w10: PortD.1 -672.68,662.32 -550,785 -550,1230 v1(-550,1585) ; v1(-235,1585) -235,1965 -190,2010 -120,2010 -75,2055 -75,2090 -95.43,2110.43 U3.12
GND: C1.1 C3.1 C4.1 C5.1 C6.1 C19.1 C22.2 C24.1 C31.2 C33.1 C34.2 C36.1 C41.1 C42.1 C59.1 C60.1 DC1.2 DC1.3 J1.1 J_5VGND.1 J_5VGND.2 K1.2 K2.2 K3.2 K4.1 K5.2 LCD1.6 MB1.35 MB1.36 MB1.37 MB1.38 MB1.39 MB1.40 pad.0@660,2560 pad.0@680,760 port1.5 port1.6 port1.7 port2.5 port2.6 port2.7 port3.5 port3.6 port3.7 port4.5 port4.6 port4.7 PortA.5 PortB.5 PortC.5@-280.1,357.09 PortD.5@-776.16,357.4 Q71.2 R51.1 R74.1 RST.1 SWD2.3 SWD.3 U1.8 U1.23 U1.35 U1.47 U3.15 U5.1 U27.3 U27.6 U27.13 U28.3 U28.6 U28.13 USART1.1 USBA1.4 | length 9157.5
  Top Layer w10: J1.1 -1180,1100 -1255,1175 -1255,1275 -1154.01,1375.99 DC1.2 -1070.33,1500.99 DC1.3 ; Q71.2 v1(-795,178.74) -741.26,178.74 R74.1 ; C24.1 -660,380 -715,325 -715,257.37 -740,232.37 R74.1 ; C4.1 -500,2875 v1(-425,2950) -305.27,2950 U1.23 ; U5.1 -389.45,249.45 -349.14,209.14 C22.2 ; v1(-350,2470) -280,2470 v1(-250,2500) C5.1 -180,2604.73 U1.35 ; J_5VGND.1 J_5VGND.2 ; C19.1 -95,304.68 ; -60,465.67 -60,350 -95,315 -95,304.68 ; v1(-60,2130) v1(25,2045) ; v1(-5,2885) -11.76,2891.76 -11.76,2940 U1.8 169.12,3120.88 ; U1.47 180.28,2715 325,2715 C6.1 ; v1(180,520) 180,529.15 C31.2 ; C3.1 200,3151.76 169.12,3120.88 ; v1(325,3115) 319.12,3120.88 169.12,3120.88 ; C33.1 v1(535,860) ; U27.3 635.61,715.61 680,760 712.39,727.61 U27.6 ; v1(641.23,2601.23) 641.23,2608.7 657.54,2625 v1(685,2625) ; U27.13 661.2,956.2 v1(685,980) ; MB1.35 MB1.36 MB1.37 MB1.38 MB1.39 MB1.40 1033.19,1961.81 v1(1035,1960) ; R74.1 -660,180 -590,110 -339.15,110 C22.2 ; C22.2 -115.86,209.14 -95,230 -95,304.68
  Bottom Layer w10: v1(-795,178.74) -791.26,178.74 -765,205 -765,280 -776.16,291.16 -776.16,357.4 PortD.5@-773,354.24 ; v1(-495.16,597.14) -427.14,597.14 -320.55,490.55 -280.1,450.1 PortC.5@-280.1,357.09 ; v1(-425,2950) -425,2755 -380,2710 C42.1 -380,2635 -350,2605 -350,2545 ; v1(-350,2470) -350,2545 ; -350,2480 -350,2545 ; v1(-250,2500) -250,2610 C41.1 ; U3.15@-132.2,2187.2 -77.2,2187.2 -60,2170 v1(-60,2130) ; LCD1.6 -44,3506.36 -75.75,3538.11 port3.6@69.8,3538.11 ; K5.2@100,748.03 103.03,748.03 165,810 165,938.94 K5.2@100,1003.94 ; PortB.5@176.3,357.4 140,393.7 140,480 v1(180,520) 216.75,483.25 PortB.5@216.75,357.4 ; v1(610,390) 639.76,390 PortA.5@672.36,357.4 ; C36.1 690,2840 740,2890 805,2890 955,2740 1025,2740 1060,2705 1060,2580 989.14,2509.14 C34.2 ; pad.0@684.39,2624.39 pad.0@685,2624.39 ; v1(685,2625) pad.0@685,2624.39 ; PortA.5@712.81,357.4 712.81,297.19 745,265 v1(745,250) ; U28.6@766.43,2545 U28.6 ; U28.3 pad.0@685,2624.39
  Bottom Layer w15: U28.13 638.8,2598.8 v1(641.23,2601.23) ; pad.0@705,2545 U28.6@766.43,2545
  Bottom Layer w20: pad.0@685,2624.39 685,2565 pad.0@705,2545
  other v1: 375,385 925,410 730,750 655,765 720,775 1025,1370 1030,1425 79.84,1527.14 -940,1665 -900,1770 -1260,1865 975,2085 1005,2110 -1045,2170 -980,2335 -200,2550 -120,2775 305,3222 930,3680 -230,3700 215,3700
GPIO0: MB1.2 MB1.3 MB1.4 MB1.5 port1.4 | length 2002.2
  Top Layer w10: MB1.2 MB1.3 MB1.4 MB1.5 -775.59,2274.41 -750,2300 v1(-570,2300)
  Bottom Layer w10: port1.4 -715.52,3240.52 -535,3060 -535,2335 v1(-570,2300)
GPIO1: MB1.10 MB1.11 MB1.12 MB1.13 port1.3 | length 1868.2
  Top Layer w10: v1(-595,2120) -545,2120 -525.59,2100.59 MB1.10 MB1.11 MB1.12 MB1.13
  Bottom Layer w10: port1.3 -747.01,3227.01 -565,3045 -565,2360 -595,2330 v1(-595,2120)
GPIO2: MB1.19 MB1.20 MB1.21 MB1.22 port2.3 | length 2409.8
  Top Layer w10: v1(-295,1845) -230,1845 ; -250,1845 -230,1845 ; MB1.19 MB1.20 MB1.21 MB1.22 74.41,1859.41 60,1845 -230,1845
  Bottom Layer w10: v1(-295,1845) -295,2630 -185,2740 -185,3375 -250.95,3440.95 port2.3
GPIO3: MB1.1 port3.3 | length 2885.4
  Top Layer w10: MB1.1 -975.59,2294.41 -945,2325 -215,2325 -190,2300 155,2300 180,2325 v1(285,2325)
  Bottom Layer w10: port3.3@245,3534.17 245,3365 205,3325 205,2990 285,2910 285,2375 v1(285,2325)
GPIO4: MB1.6 port4.3 | length 2859.8
  Top Layer w10: MB1.6 -725.59,2144.41 -700,2170 -483.48,2170 -437.92,2215.56 -437.36,2215 v1(365,2215) ; v1(600,3080) v1(705,3080)
  Bottom Layer w10: v1(365,2215) 365,2395 410,2440 410,2925 565,3080 v1(600,3080) ; v1(705,3080) 705,3350 741.06,3386.06 port4.3 port4.3@741.06,3534.17
GPIO5: K1.1 MB1.7 R61.2 | length 1276.2
  Top Layer w10: MB1.7 -675.59,1785.59 -605,1715 v1(-320,1715) v1(-155,1715)
  Bottom Layer w10: v1(-320,1715) -319.5,1714.5 -319.5,1560 ; R61.2 -319.5,1560 ; -319.5,1579.5 -319.5,1560 ; v1@-160,1715 v1(-155,1715) -100,1715 ; K1.1@-100,1614.17 -100,1635 -100,1715 ; K1.1@-100,1870.08 -100,1715
GPIO6: K5.1 MB1.8 R65.2 | length 1989.1
  Top Layer w10: MB1.8 -625.59,1795.59 -595,1765 -570,1740 -43.68,1740 -36.84,1746.84 v1(-35,1745)
  Bottom Layer w10: R65.2 -151.47,799.5 -100,748.03 -100,1003.94 -35,1068.94 v1(-35,1745)
GPIO7: K2.1 MB1.9 R62.2 | length 2105.7
  Top Layer w10: MB1.9 -575.59,1810.59 -531.84,1766.84 213.16,1766.84 v1(245,1735) ; v1(250,1500) v1(575,1500)
  Bottom Layer w10: v1(245,1735) 245,1505 v1(250,1500) ; K2.1@475.73,1400.73 K2.1@490.55,1415.55 ; K2.1@490.55,1181.1 K2.1@490.55,1415.55 ; R62.2 674.5,1599.5 v1(575,1500) K2.1@490.55,1415.55
GPIO9: K4.2 MB1.15 R64.2 | length 1447.1
  Top Layer w10: v1(-490,2095) -445.96,2095 -420.96,2120 -325,2120 -275.59,2070.59 MB1.15
  Bottom Layer w10: v1(-490,2095) -490,2045.55 -490.55,2045 -490.55,1437.01 -490.55,1181.1 -468.95,1159.5 R64.2
GPIO10: MB1.16 port4.2 | length 3009.8
  Top Layer w10: MB1.16 -225.59,1894.41 ; v1(255,1785) 253,1787 -342,1787 -355,1800 -355,1860 -342,1873 -247,1873 -240,1880 ; -240,1880 -225.59,1894.41 ; -240,1880 -235,1880 -225.59,1889.41 -225.59,1894.41
  Bottom Layer w10: v1(255,1785) 255,2130 325,2200 325,2350 310,2365 310,2960 405,3055 405,3385 441.38,3421.38 696.38,3421.38 709.56,3434.56 port4.2 port4.2@709.56,3534.17
GPIO11: MB1.17
GPIO12_RX: MB1.18 U1.30 USART1.2 | length 1983.1
  Top Layer w10: USART1.2 -343.92,2580 U1.30 ; v1(-420,2170) -290,2170 -230,2110 -155.59,2110 -125.59,2080 -125.59,2050 MB1.18
  Bottom Layer w10: v1@-420,2165 v1(-420,2170) v1(-420,2580)
GPIO13: MB1.23 port2.2 | length 2374.4
  Top Layer w10: v1(-325,1820) -320,1815 95,1815 120,1840 120,1957.4 MB1.23
  Bottom Layer w10: v1(-325,1820) -325,2638.16 -208.16,2755 -208.16,3355.71 -282.44,3430 port2.2
GPIO14: MB1.24 port3.2 | length 1902.5
  Top Layer w10: MB1.24 174.41,2044.41 195,2065 290,2065 345,2120 345,2165 325,2185 v1(260,2185)
  Bottom Layer w10: port3.2@213.5,3534.17 215,3532.67 215,3415 165,3365 135,3365 120,3350 120,3060 160,3020 160,2945 170,2935 170,2915 235,2850 235,2700 260,2675 260,2310 ; v1(260,2185) 260,2310 ; 260,2295 260,2310
GPIO15: MB1.25 port1.2 | length 3325.2
  Top Layer w10: v1@-880,1815 v1(-885,1820) -750,1685 255,1685 295,1725 295,1798.82 224.41,1869.41 MB1.25
  Bottom Layer w10: v1(-885,1820) -916.18,1851.18 -916.18,3283.82 -830,3370 -803.51,3370 -778.51,3395 port1.2
GPIO16: MB1.26
GPIO19: MB1.33 USBA1.2 | length 612.2
  Top Layer w10: MB1.33 624.41,1635.94 USBA1.2
GPIO20: MB1.34 USBA1.3 | length 512.7
  Top Layer w10: MB1.34 674.41,1664.68 USBA1.3
KEY: D71.2 K3.1 R73.1 | length 1391.7
  Top Layer w10: R73.1 -800,930 -780,950 v1(-290,950)
  Bottom Layer w10: v1(-290,950) -290,960 -265,985 -265,1175 D71.2 -153.9,1235 -100,1181.1 K3.1@-100,1437.01
LCDCS: LCD1.12 U1.40 | length 1415.2
  Top Layer w10: U1.40 220.4,2480 v1(375,2480)
  Bottom Layer w10: v1(375,2480) 375,2640 ; 375,2500 375,2640 ; LCD1.12 556,3101 375,2920 375,2855 375,2640
LCDRST: LCD1.11 U1.39 | length 1259.7
  Top Layer w10: U1.39 1.39,2673.61 220,2455 v1(345,2455)
  Bottom Layer w10: v1(345,2455) 345,2930 456,3041 LCD1.11
LEDA: LCD1.5 Q61.3 | length 385.2
  Bottom Layer w10: LCD1.5 -144,3099 -76.26,3031.26 80,3031.26
MB3V3: D72.2 MB1.27 MB1.28 MB1.29 MB1.30 MB1.31 MB1.32 | length 637.3
  Top Layer w10: MB1.27 MB1.28 MB1.29 ; MB1.29@425,1961.22 MB1.29 ; v1(515,1830) MB1.31@515,1946.22 ; MB1.32 MB1.31 MB1.30 MB1.29
  Bottom Layer w10: v1(515,1830) 515,1680 D72.2 D72.2@570,1625
MCU2_LED: D41.2 U3.11 | length 629.1
  Top Layer w10: v1(-525,2145) -515,2135 -430,2135 -428,2137 -297,2137 v1(-205,2045)
  Bottom Layer w10: D41.2 -657,2075 -575,2075 -525,2125 v1(-525,2145) ; v1(-205,2045) -165,2045 -150,2060 -150,2084.45 U3.11
MCU2_TX: pad.0@295,2145 U3.8 | length 220.3
  Top Layer w10: v1(160,2135) 300,2135 pad.0@305,2140
  Bottom Layer w10: U3.8 163.98,2136.02 v1@165,2135
MCURX: MB1.14 U1.31 U3.9 USART1.3 | length 3471
  Top Layer w10: USART1.3 -1175,2555 v1(-380,2555) -341.08,2555 U1.31 ; v1(-380,1650) v1(165,1650) ; v1(-380,2090) -325.59,2035.59 MB1.14
  Bottom Layer w10: v1(-380,1650) v1(-380,2090) -380,2290 ; -380,2120 -380,2290 ; v1(-380,2555) -380,2290 ; U3.9 149.57,2110.43 175,2085 175,1825 165,1815 v1(165,1650)
NetC32_1: C32.1 U27.11 | length 669.1
  Top Layer w10: v1(465,1020) 440,995 440,780 C32.1 ; v1(695,1020) 712.39,1002.61 U27.11
  Bottom Layer w10: v1(465,1020) v1(695,1020)
NetC33_2: C33.2 U27.14 | length 312.5
  Top Layer w10: C33.2 485,930.5 v1(485,985) ; U27.14 635.61,970.61 v1(645,980)
  Bottom Layer w10: v1(485,985) 640,985 v1(645,980)
NetC35_1: C35.1 U28.11 | length 852
  Top Layer w10: v1(655,2440) 810,2440 855,2485 v1(855,2775)
  Bottom Layer w10: U28.11 572.39,2547.61 585,2535 585,2455 600,2440 v1(655,2440) ; C35.1 790,2840 v1(855,2775)
NetC36_2: C36.2 U28.14 | length 242.9
  Bottom Layer w10: U28.14 574.39,2624.39 642,2692 642,2737.5 652.25,2747.75 C36.2@679,2774.5
NetD4_1: D4.1 R4.2 | length 119.9
  Top Layer w10: R4.2 -718.5,2501.5 D4.1
NetD41_1: D41.1 R41.2 | length 101.5
  Bottom Layer w10: D41.1@-740.5,2079 R41.2
NetQ61_1: Q61.1 R77.1 | length 480.7
  Top Layer w10: v1(230,2625) 335,2625 340,2620
  Bottom Layer w10: Q61.1 97.4,2757.6 v1(230,2625)
NetQ71_1: Q71.1 R72.1 R74.2 | length 999
  Top Layer w10: R74.2 -939.5,119.5 -957.4,137.4 Q71.1 -915,221.14 -808.86,221.14 -740,290 -740,350 -715,375 -715,520 -655,580 -655,655 R72.1 R72.1@-700,695
NetQ71_3: Q71.3 Q74.1 Q79.1 R71.2 R73.2 UMOS.4 | length 1526.6
  Top Layer w10: Q79.1 -1085,373.66 -1085,300 -1056.26,271.26 Q71.3 ; Q71.3@-924.92,266.34 Q71.3 ; v1(-835,935) -900.5,869.5 R71.2 -875.5,760.5 -814.5,699.5 R73.2 -705,605 -705,565 -745,525 -745,396.34 Q74.1 -848.66,342.6 Q71.3 ; v1(-835,1115) -790,1070 UMOS.4
  Bottom Layer w10: v1(-835,935) v1(-835,1115)
OSC_IN: C59.2 U1.5 Y1.1 | length 1117.2
  Top Layer w10: U1.5 176.76,3045 305,3045 410,2940 630,2940 690,3000 Y1.1@780,3000 ; C59.2 780,3154.5 Y1.1@780,3000 ; Y1.1@910.32,3000 Y1.1@780,3000
OSC_IN2: C41.2 U3.2 Y2.1 Y2.@-9.68,2520 | length 650.7
  Top Layer w10: v1(-30,2440) -5,2440 35,2400 v1(35,2355)
  Bottom Layer w10: -135,2535 -134.5,2534.5 ; C41.2 -134.5,2534.5 ; v1(-30,2440) -30,2499.68 -9.68,2520 -120,2520 ; v1(35,2355) 15,2335 15,2305 30,2290 91.77,2290 U3.2 ; -134.5,2534.5 -120,2520 ; -134.5,2534.5 -134.5,2525.5 Y2.1 -120,2520
OSC_OUT: C60.2 U1.6 Y1.2 | length 767
  Top Layer w10: U1.6 168.92,3065 392.56,3065 457.56,3000 Y1.2@587.88,3000 ; 534.5,3000.5 C60.2
OSC_OUT2: C42.2 U3.3 Y2.2 Y2.@-462.44,2520 | length 1225.7
  Top Layer w10: v1(-455,2460) -440,2445 -275,2445 -270,2450 -105,2450 -70,2485 v1(-70,2560) ; v1(50,2540) 95,2495 v1(95,2425)
  Bottom Layer w10: v1@-450,2460 -462.44,2472.44 -462.44,2520 -462.44,2643.06 C42.2 ; v1(-70,2560) -55,2575 15,2575 v1(50,2540) ; U3.3 143.98,2263.98 165,2285 165,2320 140,2345 130,2345 95,2380 v1(95,2425)
PA4: R72.2 U1.14 | length 3580.2
  Top Layer w10: v1(-885,3265) -440,3265 v1(-380,3205) ; R72.2@-691,770 R72.2 -700.5,769.5 v1(-635,835) ; v1(-240,3205) -180,3145 -180,3075 ; -179.72,3075 U1.14
  Bottom Layer w10: v1(-885,3265) -885,1925 -730,1770 -730,1520 -755,1495 -755,1375 -680,1300 -665,1300 -635,1270 v1(-635,835) ; v1(-380,3205) v1(-240,3205)
PA12: D4.2 U1.33 | length 447.8
  Top Layer w10: D4.2 -510,2500 -483.25,2526.75 -313.66,2526.75 U1.33
PA15: R77.2 U1.38 | length 664.3
  Top Layer w10: U1.38 194.34,2450.38 ; 199.73,2445 194.34,2450.38 ; R77.2 360.5,2539.5 405,2495 405,2455 370,2420 224.73,2420 194.34,2450.38
PC13: LCD1.8 U1.2 | length 491.8
  Top Layer w10: U1.2 178.24,2962.97 197.03,2962.97 215,2945 v1(215,2925)
  Bottom Layer w10: LCD1.8 156,3064 182.5,3037.5 182.5,2957.5 v1(215,2925)
PC14: LCD1.9 U1.3 | length 425.9
  Top Layer w10: U1.3 182.43,2995 v1(245,2995)
  Bottom Layer w10: v1(245,2995) 245,3221.13 LCD1.9
PC15: LCD1.10 U1.4 | length 511.4
  Top Layer w10: U1.4 82.88,2922.88 180,3020 280,3020 v1(295,3005)
  Bottom Layer w10: v1(295,3005) 295,3171.13 LCD1.10
RST: U1.7
RST2: C1.2 R5.1 RST.2 U3.4 | length 3526.8
  Top Layer w10: v1(205,2245) 395,2245 460,2180 v1(1090,2180) ; R5.1 615,3740 710,3645 710,3556.06 RST.2@746.06,3520 ; RST.2@770,3496.06 RST.2@746.06,3520 ; v1(845,3350) 995,3350 1001.97,3356.97 1001.97,3520 946.97,3575 801.06,3575 RST.2@746.06,3520
  Bottom Layer w10: U3.4 198.39,2238.39 v1(205,2245) ; v1@845,3355 v1(845,3350) 845,2975 970,2850 1055,2850 1145,2760 1145,2455 1110,2420 1110,2200 v1(1090,2180)
SWCLK: SWD.1 U1.37 | length 1227.8
  Top Layer w10: v1(-685,2360) -166.03,2360 -28.88,2497.15 U1.37
  Bottom Layer w10: SWD.1 -700,2670 -685,2655 v1(-685,2360)
SWCLK2: SWD2.1 U3.20 | length 1715
  Top Layer w10: v1(-1120,2470) -955,2470 -895,2410 -715,2410 -700,2425 -190,2425 v1(-165,2400)
  Bottom Layer w10: SWD2.1 -1130,1960 -1090,2000 -1090,2105 -1120,2135 v1(-1120,2470) ; v1(-165,2400) -165,2326.61 U3.20
SWDIO: SWD.2 U1.34 | length 1001.9
  Top Layer w10: v1(-645,2455) -500,2455 -455,2500 -312.57,2500 U1.34
  Bottom Layer w10: SWD.2 -625,2745 -625,2660 -645,2640 v1(-645,2455)
SWDIO2: SWD2.2 U3.19 | length 1540.1
  Top Layer w10: v1(-1180,2435) -965,2435 -920,2390 v1(-255,2390)
  Bottom Layer w10: SWD2.2 -1170,2110 -1170,2415 -1180,2425 v1(-1180,2435) ; v1(-255,2390) -230,2365 -230,2310 -209.57,2289.57 U3.19 U3.19@-132.2,2289.57
VOUT: J_12V.1 J_12V.2 Q74.2 Q79.3 UMOS.5 UMOS.6 UMOS.7 UMOS.8 | length 2404.3
  Top Layer w10: Q79.3@-965,383.74 -965,465 v1(-965,470) ; v1(-850,470) -850,468.66 Q74.2 Q74.2@-798.74,421.26 ; v1(-745,1320) -705,1280 -680,1280 -650,1250 -650,1190 -580,1120 UMOS.6 ; UMOS.5 UMOS.6 ; UMOS.8 UMOS.7 UMOS.6
  Top Layer w15: Q74.2@-798.74,421.26 -798.74,521.26 v1(-750,570) ; UMOS.5 v1(-420,1070)
  Bottom Layer w10: v1(-965,470) v1(-850,470) ; v1(-750,570) -750,775 -709.92,815.08 -709.92,984.92 -800,1075 -800,1265 v1(-745,1320) ; v1(-420,1070) v1@-415,1070
  Bottom Layer w15: v1@-415,1070 -350,1005 -350,905 -255,905 -180,980 ; J_12V.1 J_12V.2
  Bottom Layer w20: -180,980 J_12V.1
YTINT: D71.1 R63.2 U1.41 | length 1694.1
  Top Layer w10: U1.41 28.55,2701.45 145,2585 v1(155,2585)
  Bottom Layer w10: R63.2 -209.5,1360.5 D71.1 -205,1885 -115,1975 -60,1975 -35,2000 -35,2395 v1(155,2585)
pads on no net: LCD1.1 LCD1.2 LCD1.3 LCD1.4 MB1.41 MB1.42 MB1.43 MB1.44 port1.MH1 port1.MH2 port2.4 port2.MH1 port2.MH2 port3.4 port3.MH1 port3.MH2 port4.4 port4.MH1 port4.MH2 PortA.7 PortA.MH1 PortA.MH2 PortB.7 PortB.MH1 PortB.MH2 PortC.5@-320.55,357.09 PortC.7 PortC.MH1 PortC.MH2 PortD.5@-816.61,357.4 PortD.7 PortD.MH1 PortD.MH2 U1.12 U1.13 U1.20 U1.21 U1.22 U1.25 U1.26 U1.27 U1.28 U1.29 U1.32 U1.45 U1.46 U3.14 U27.8 U28.8 USBA1.5

## Polygon pours and split planes (outlines as drawn)
GND on Top Layer "Top Layer-No Net" (solid): -910,3770 -905,3765 980,3765 980,2975 1020,2935 1035,2920 1225,2920 1265,2880 1270,2875 1270,1000 1155,885 960,885 945,870 945,75 945,65 935,55 915,35 625,35 -940,35 -985,80 -985,870 -990,870 -1015,895 -1020,900 -1265,900 -1265,2885 -1225,2925 -1220,2930 -985,2930 -985,3720 -935,3770 -910,3770
GND on Bottom Layer "Top Layer-No Net" (solid): -960,3780 -950,3770 975,3770 975,2985 1035,2925 1055,2905 1240,2905 1250,2905 1280,2875 1280,995 1280,990 1185,895 1163.52,873.52 948.52,873.52 948.52,68.52 930,50 920,40 -885,40 -955,40 -975,60 -980,65 -980,620 -980,865 -1020,905 -1025,900 -1270,900 -1270,2875 -1240,2905 -1210,2935 -975,2935 -975,3765 -960,3780

## Keep-outs
Keep-Out Layer:
  lines w5: -1317.86,872.05 ccw(c-1278.49,872.05) -1278.49,832.68 -1030.46,832.68 cw(c-1030.46,812.99) -1010.78,812.99 -1010.78,498.03 cw(c-1030.46,498.03) -1030.46,478.35 -1081.64,478.35 ccw(c-1081.64,438.98) -1121.01,438.98 -1121.01,220.47 -1089.52,220.47 cw(c-1089.52,177.17) -1089.52,133.86 -1121.01,133.86 -1121.01,78.74 ccw(c-1042.27,78.74) -1042.27,0 1044.34,0 ccw(c1044.34,78.74) 1123.08,78.74 1123.08,133.86 1091.59,133.86 cw(c1091.59,177.17) 1091.59,220.47 1123.08,220.47 1123.08,438.98 ccw(c1083.71,438.98) 1083.71,478.35 1032.53,478.35 cw(c1032.53,498.03) 1012.85,498.03 1012.85,812.99 cw(c1032.53,812.99) 1032.53,832.68 1280.56,832.68 ccw(c1280.56,872.05) 1319.93,872.05 1319.93,1218.51 1319.93,1734.25 1319.93,2946.85 ccw(c1280.56,2946.85) 1280.56,2986.22 1032.53,2986.22 cw(c1032.53,3005.91) 1012.85,3005.91 1012.85,3320.87 cw(c1032.53,3320.87) 1032.53,3340.55 1083.71,3340.55 ccw(c1083.71,3379.92) 1123.08,3379.92 1123.08,3598.43 1091.59,3598.43 cw(c1091.59,3641.73) 1091.59,3685.04 1123.08,3685.04 1123.08,3740.16 ccw(c1044.34,3740.16) 1044.34,3818.9 -1042.27,3818.9 ccw(c-1042.27,3740.16) -1121.01,3740.16 -1121.01,3685.04 -1089.52,3685.04 cw(c-1089.52,3641.73) -1089.52,3598.43 -1121.01,3598.43 -1121.01,3379.92 ccw(c-1081.64,3379.92) -1081.64,3340.55 -1030.46,3340.55 cw(c-1030.46,3320.87) -1010.78,3320.87 -1010.78,3005.91 cw(c-1030.46,3005.91) -1030.46,2986.22 -1278.49,2986.22 ccw(c-1278.49,2946.85) -1317.86,2946.85 -1317.86,1728.21 -1317.86,1382.03 -1317.86,872.05

## Silkscreen, mask and mechanical layers (free items; w line width, h text height)
Top Overlay:
  lines w10: 0,0 0,2170
  text "3V3" at -865,3110 h35
  text "3V3" at -870,3040 h35
  text "GND" at -870,2895 h35
  text "RST" at -1115,2890 h35
  text "SWIO" at -895,2805 h35
  text "SWCLK" at -930,2700 h35
  text "GND" at -1175,2665 h35
  text "STC_TX" at -1185,2560 h35
  text "STC_RX" at -1185,2495 h35
  text "+" at -625,2425 h39.37
  text "BAT+" at -1130,1260 h39.37
  text "GND" at -1120,995 h39.37
  text "v3.1" at 1075,945 h39.37
Bottom Overlay:
  text "En1N" at 915,3270 h39.37
  text "En1P" at 1235,2875 h39.37
  text "+" at -765,2005 h39.37

## Text inside footprints (layer, text, board x,y; h text height)
USBA1: Top Overlay "V" at 761.85,1327.67 h30 r90; Top Overlay "G" at 761.85,1598.67 h30 r90; Top Overlay "1" at 1236.85,1328.67 h30 r90; Top Overlay "2" at 1236.85,1430.67 h30 r90; Top Overlay "3" at 1235.85,1499.67 h30 r90; Top Overlay "4" at 1236.85,1600.67 h30 r90; Top Overlay "D+" at 762.85,1496.67 h30 r90; Top Overlay "D-" at 760.85,1410.67 h30 r90